# Altium PCB PCB1.PcbDoc
Units mm, origin at the board's own origin, x right, y up, seen from the top; angles counter-clockwise.
Board outline 152.4 x 101.6 mm, 2 copper layers (Top Layer, Bottom Layer); 31 components, 28 nets, 112 pads, 6 vias.
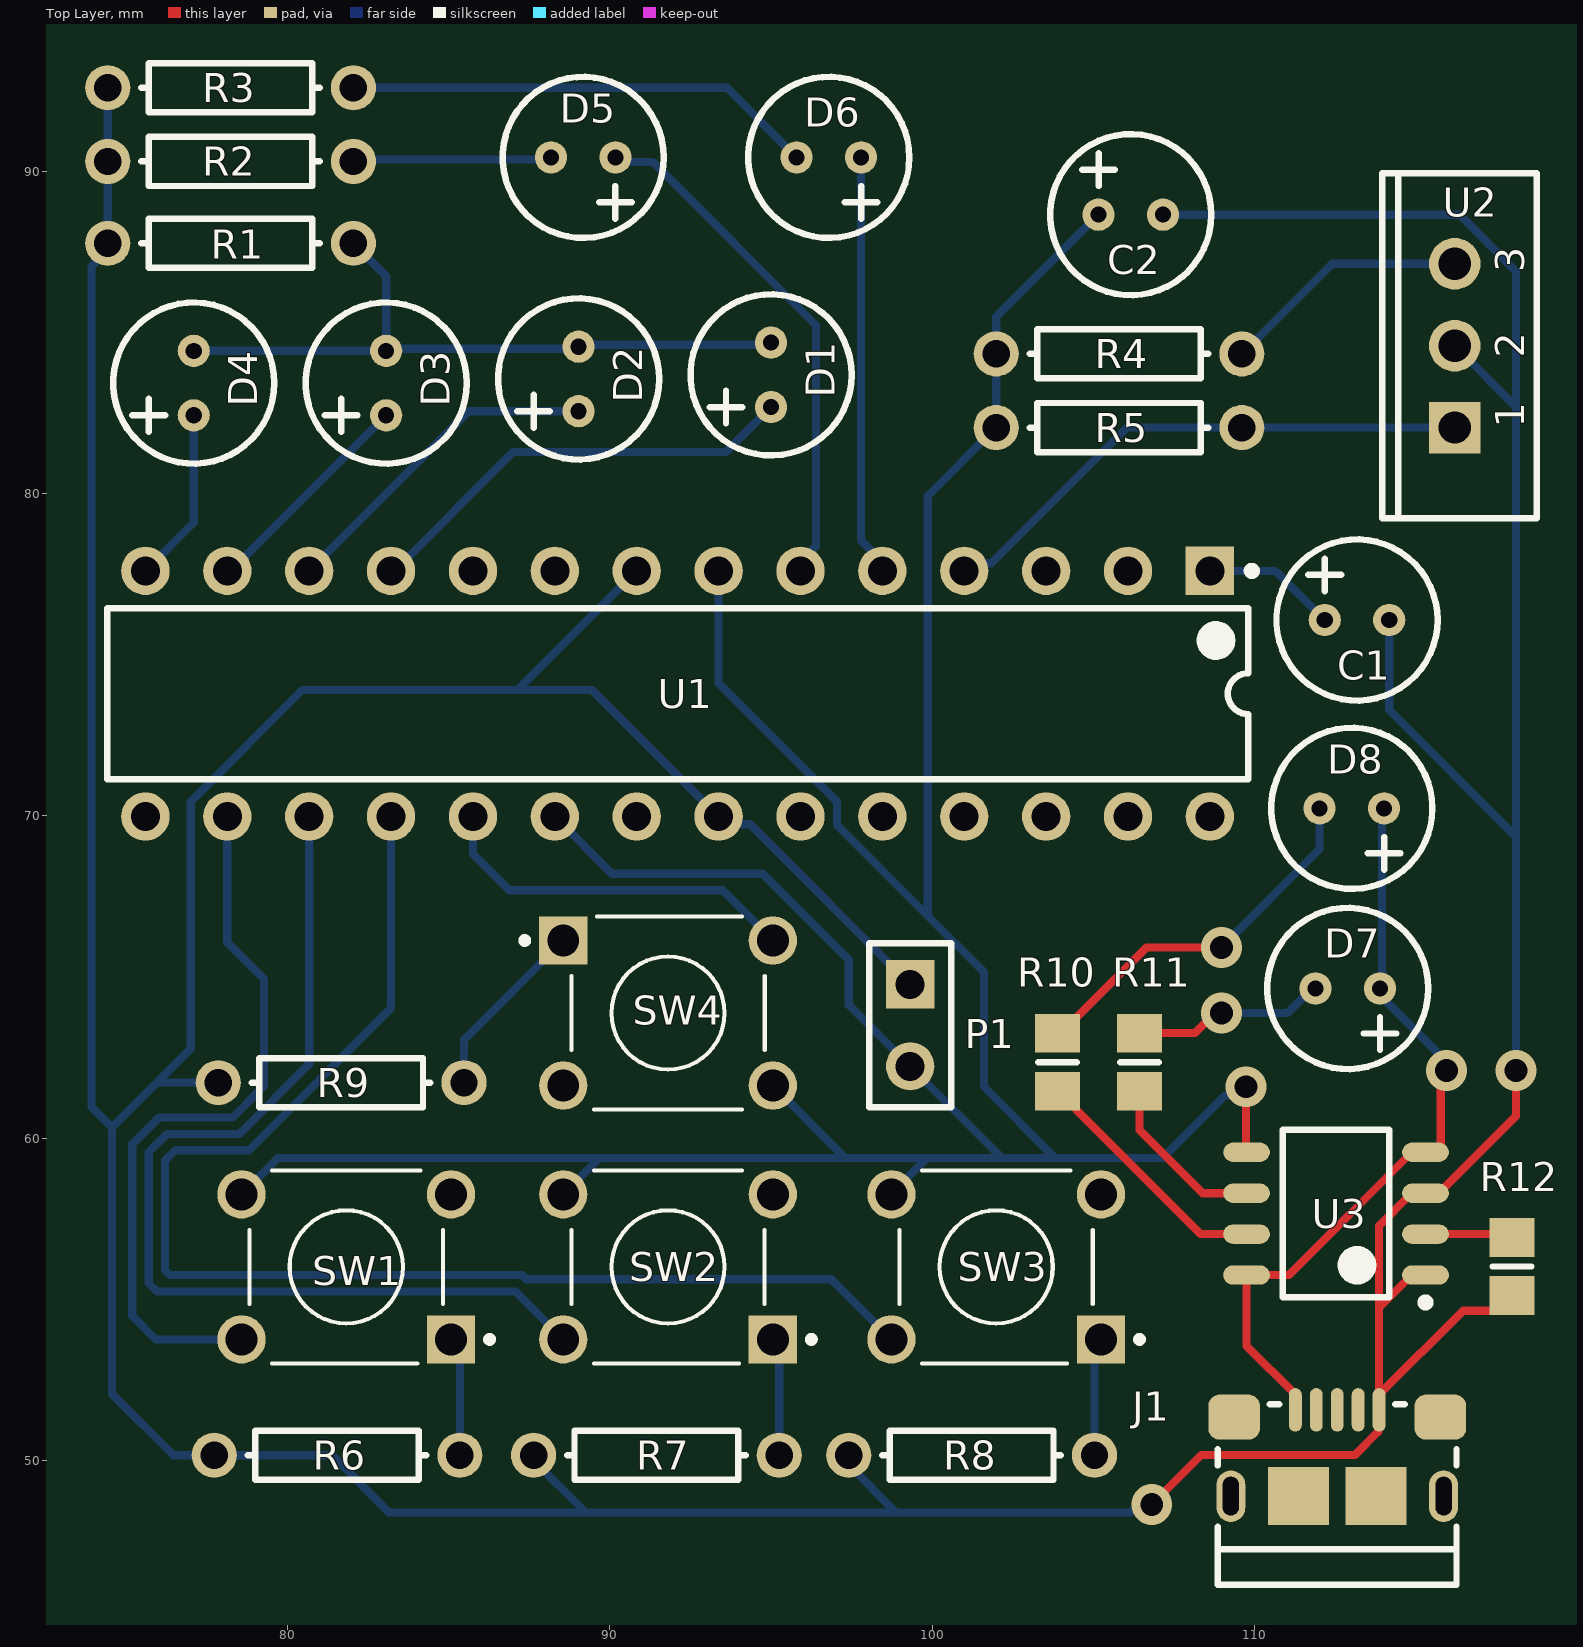
[diagram p0: Top Layer view]
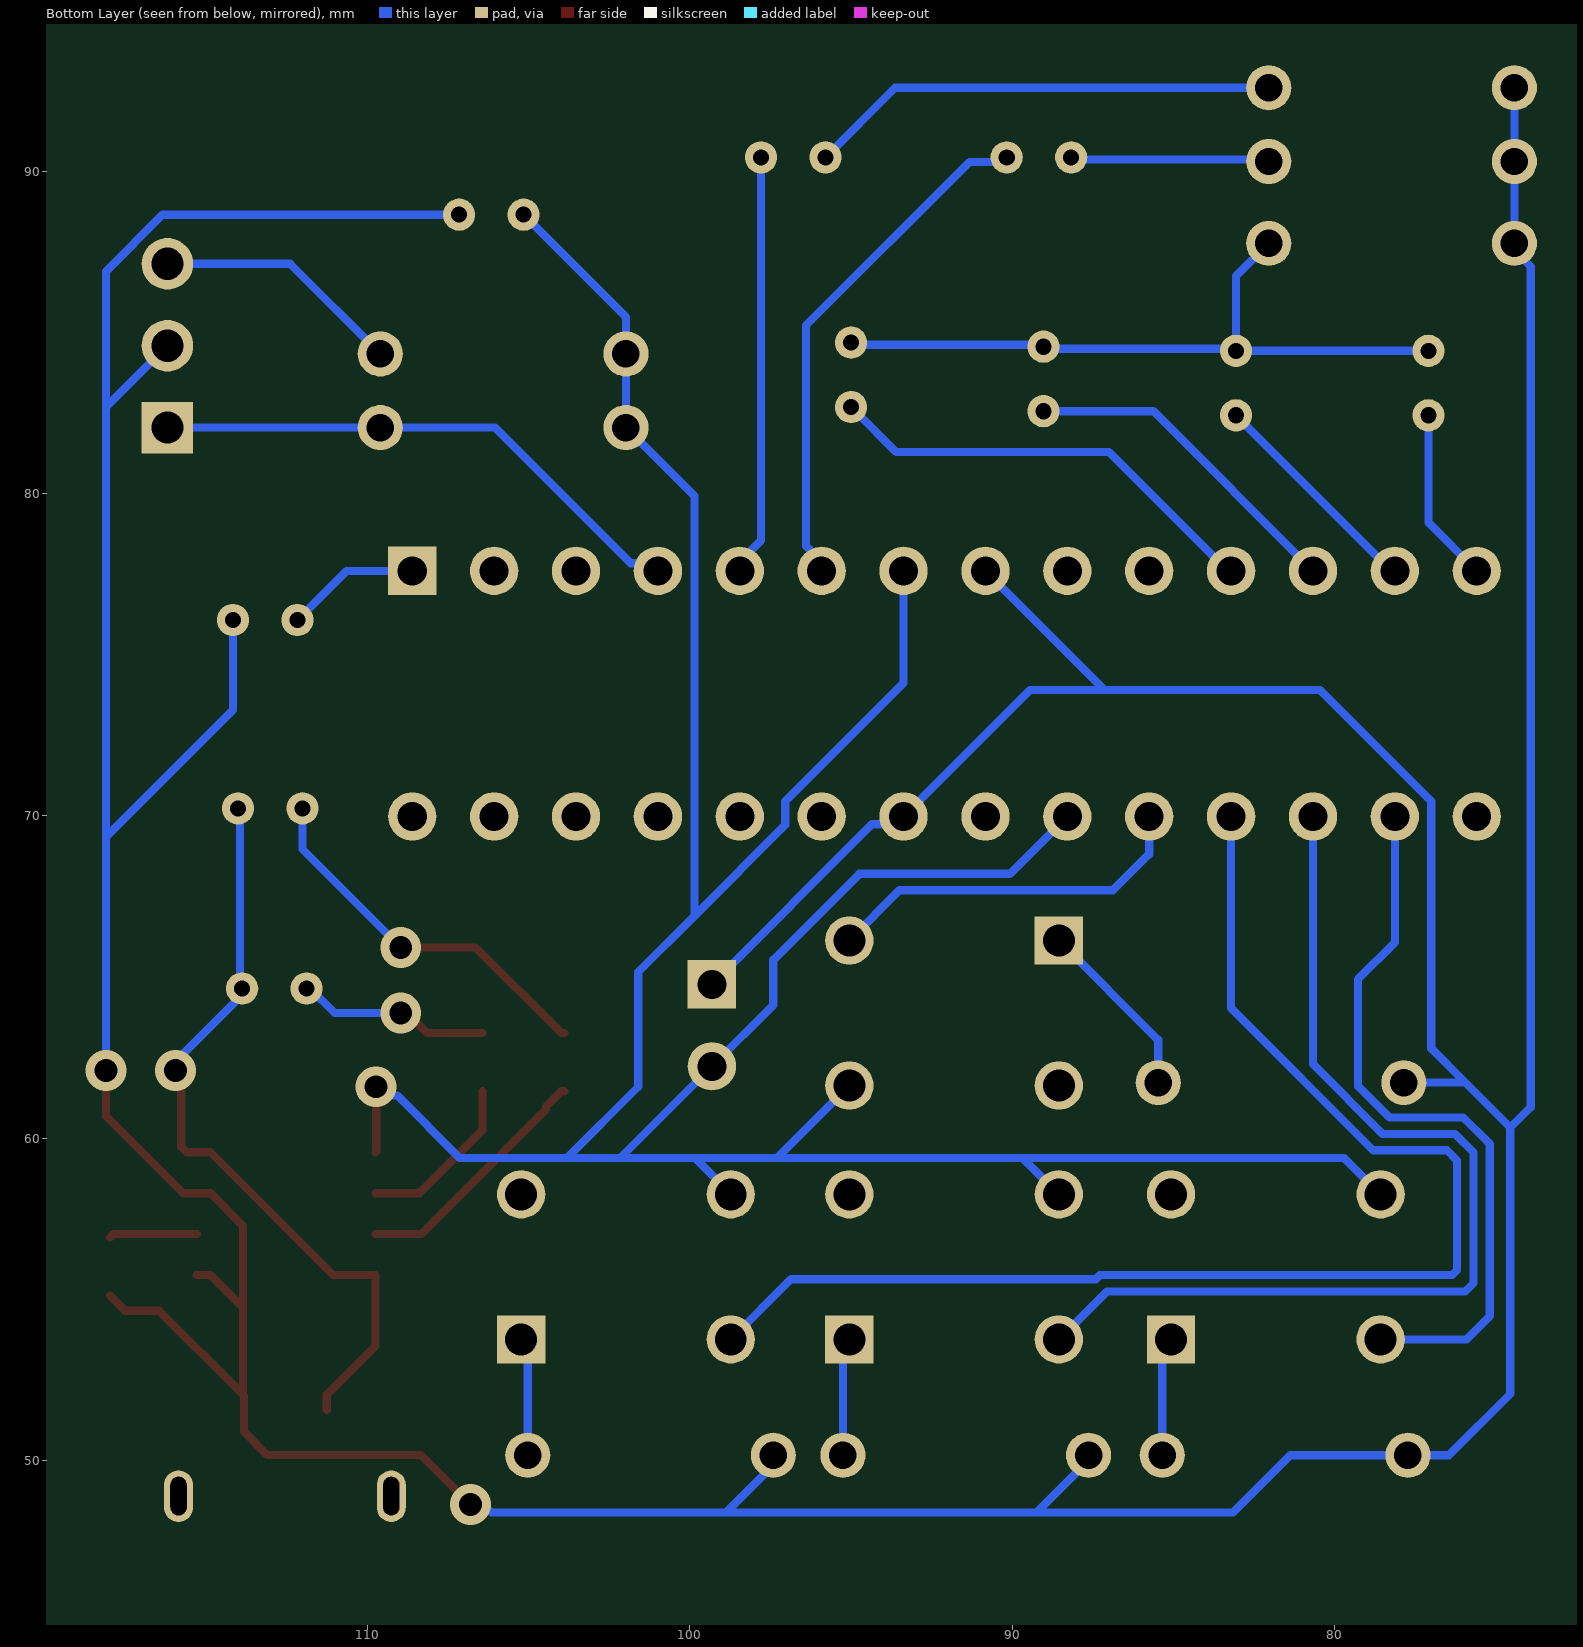
[diagram p1: Bottom Layer view, seen from below]

## Layer stack, top to bottom
Top Solder: solder mask 0.0102, Solder Resist, Dk 3.5
Top Layer: signal copper 0.0356
Dielectric 1: dielectric 0.32, FR-4, Dk 4.8
Bottom Layer: signal copper 0.0356
Bottom Solder: solder mask 0.0102, Solder Resist, Dk 3.5

## Board outline
25.4,25.4 177.8,25.4 177.8,127 25.4,127

## Design rules (kind name [scope] priority, off if disabled: settings)
BoardOutlineClearance [All] p1: gap=0.2 ignorepadtopadclearanceinfootprint=FALSE except(0.4: Arc-SplitBarrior Arc-SplitContinuation Track-SplitBarrior Track-SplitContinuation SMDPad-SplitBarrior SMDPad-SplitContinuation THPad-SplitBarrior THPad-SplitContinuation Via-SplitBarrior Via-SplitContinuation Fill-SplitBarrior Fill-SplitContinuation Poly-SplitBarrior Poly-SplitContinuation Region-SplitBarrior Region-SplitContinuation Text-SplitBarrior Text-SplitContinuation)
Clearance "Clearance Bottom Layer" [OnLayer('Bottom Layer')] p1: gap=0.203 ignorepadtopadclearanceinfootprint=TRUE except(0.254: Arc-Text Track-Text SMDPad-Text THPad-Text Via-Text Fill-Text Poly-Text Region-Text Text-Text)
Clearance "Clearance Top Layer" [OnLayer('Top Layer')] p2: gap=0.203 ignorepadtopadclearanceinfootprint=TRUE except(0.254: Arc-Text Track-Text SMDPad-Text THPad-Text Via-Text Fill-Text Poly-Text Region-Text Text-Text)
Clearance [All] p3: gap=0.2 ignorepadtopadclearanceinfootprint=FALSE except(0.089: Arc-Arc Arc-Track Arc-SMDPad Track-Track Track-SMDPad SMDPad-SMDPad; 0.127: Arc-Via Track-Via SMDPad-Via THPad-Via Via-Via; 0.254: Arc-Text Track-Text SMDPad-Text THPad-Text Via-Text Fill-Text Poly-Text Region-Text Text-Text)
HoleSize [All] p1: absolutevalues=TRUE maxlimit=6.3 minlimit=0.2 maxpercent=80.000 minpercent=20.000
MinimumAnnularRing [All] p1: minimumring=0.076
MinimumSolderMaskSliver [All] p1: minsoldermaskwidth=0.1
PolygonConnect PolygonConnect_1 [All] p1: thpad.connectstyle=Relief thpad.reliefconductorwidth=0.508 thpad.reliefentries=4 thpad.polygonreliefangle="90 Angle" thpad.airgapwidth=0.254 smdpad.connectstyle=Relief smdpad.reliefconductorwidth=0.508 smdpad.reliefentries=4 smdpad.polygonreliefangle="90 Angle" smdpad.airgapwidth=0.254 via.connectstyle=Direct via.reliefconductorwidth=0.508 via.reliefentries=4 via.polygonreliefangle="90 Angle" via.airgapwidth=0.254
RoutingCorners [All] p1: cornerstyle=Round minsetback=2.54 maxsetback=2.54
RoutingVias [All] p1: holewidth=0.5 width=1 viastyle="Through Hole" minholewidth=0.2 minwidth=0.45 maxholewidth=1 maxwidth=2
SilkToSilkClearance [All] p1: silktosilkclearance=0.1
SilkToSolderMaskClearance [IsPad] p1: minsilkscreentomaskgap=0.1 clearancetoexposedcopper=TRUE
SolderMaskExpansion [All] p1: expansion=0.102 istentingtop=FALSE
Width [All] p1: maxlimit=2.54 minlimit=0.089 preferedwidth=0.381
25 further rules are at their usual default settings.

## Classes and differential pairs
component class "Remote V2": C1 C2 D1 D2 D3 D4 D5 D6 D7 D8 J1 P1 R2 R3 R4 R5 R6 R7 R8 R9 R10 R11 R12 SW1 SW2 SW3 U1 U2 U3

## Components (designator, comment, footprint, x,y, rotation, side; value= is the part's Value field where it differs from the comment)
C1 "Cap Pol1" "5mm CAP" 112.173,76.073 r0 top value=10uF
C2 "Cap Pol1" "5mm CAP" 105.156,88.646 r0 top value=100uF
D1 "GREEN" "5mm CAP" 94.996,82.677 r90 top
D2 "GREEN" "5mm CAP" 89.027,82.55 r90 top
D3 "GREEN" "5mm CAP" 83.058,82.423 r90 top
D4 "GREEN" "5mm CAP" 77.089,82.423 r90 top
D5 "RED" "5mm CAP" 90.17,90.424 r180 top
D6 "IR" "5mm CAP" 97.79,90.424 r180 top
D7 "GREEN" "5mm CAP" 113.887,64.643 r180 top
D8 "RED" "5mm CAP" 114.014,70.231 r180 top
J1 "10118193-0001LF" "FCI USB 10118193-0001LF" 112.56,48.945 r180 top
P1 "Header 2" HDR1X2 99.314,64.77 r270 top
R1 "Res1" AXIAL-0.3 78.232,87.757 r0 top value=1K
R2 "Res1" AXIAL-0.3 78.232,90.297 r0 top value=1K
R3 "Res1" AXIAL-0.3 78.232,92.583 r0 top value=220R
R4 "Res1" AXIAL-0.3 105.791,84.328 r180 top value=100R
R5 "Res1" AXIAL-0.3 105.791,82.042 r180 top value=47k
R6 "Res1" AXIAL-0.3 81.534,50.165 r0 top value=22k
R7 "Res1" AXIAL-0.3 91.44,50.165 r0 top value=22k
R8 "Res1" AXIAL-0.3 101.219,50.165 r0 top value=22k
R9 "Res1" AXIAL-0.3 81.661,61.722 r0 top value=22k
R10 "Res1" 6-0805_N 103.886,62.357 r90 top value=1K
R11 "Res1" 6-0805_N 106.426,62.357 r90 top value=1k
R12 "Res1" 6-0805_N 117.983,56.018 r90 top value=2k
SW1 "430476085716" SW_1825910-6-4 81.821,56.007 r180 top
SW2 "430476085716" SW_1825910-6-4 91.802,56.007 r180 top
SW3 "430476085716" SW_1825910-6-4 101.981,56.007 r180 top
SW4 "430476085716" SW_1825910-6-4 91.802,63.881 r0 top
U1 "ATmega328P-PU" 28P3 92.1,73.787 r270 top
U2 "CHO 1838" TO-220-AB 116.205,84.582 r90 top
U3 "TP4056" "Universal SOP 8" 112.522,57.658 r180 top

## Footprints (in the part's own frame and the unit in brackets; to place one, negate y for a bottom-side part, rotate by r counter-clockwise, add the part's x,y. Pads: shape width x height; smd on the part's side, far side on the other; paste and mask are expansions set on the pad)
"5mm CAP" [mm]
  round 1 hole 0.5: 1(0,0) 2(2,0)
  silkscreen extent -1.5,-2.5 3.5,2.5
6-0805_N [mm] "Chip Resistor, Body 2.0x1.2mm, IPC Medium Density"
  rect 1.2x1.4 smd: 1(-0.9,0) 2(0.9,0)
  silkscreen extent 0,-0.6 0,0.6, body extent -1.07,-0.7 1.07,0.7, height 0.7
28P3 [mm] "28-Pin Plastic Dual In-Line Package (PDIP)"
  rect 1.5x1.5 hole 0.9: 1(-3.81,16.51)
  round 1.5 hole 0.9: 2(-3.81,13.97) 3(-3.81,11.43) 4(-3.81,8.89) 5(-3.81,6.35) 6(-3.81,3.81) 7(-3.81,1.27) 8(-3.81,-1.27) 9(-3.81,-3.81) 10(-3.81,-6.35) 11(-3.81,-8.89) 12(-3.81,-11.43) 13(-3.81,-13.97) 14(-3.81,-16.51) 15(3.81,-16.51) 16(3.81,-13.97) 17(3.81,-11.43) 18(3.81,-8.89) 19(3.81,-6.35) 20(3.81,-3.81) 21(3.81,-1.27) 22(3.81,1.27) 23(3.81,3.81) 24(3.81,6.35) 25(3.81,8.89) 26(3.81,11.43) 27(3.81,13.97) 28(3.81,16.51)
  silkscreen extent -3.93,-17.7 2.65,17.94, body extent -3.6,-17.65 3.6,17.65, height 4.58
AXIAL-0.3 [mm] "Axial Device, Thru-Hole; 2 Leads; 0.3 in Pin Spacing"
  round 1.4 hole 0.85: 1(-3.81,0) 2(3.81,0)
  silkscreen extent -2.77,-0.76 2.77,0.76
"FCI USB 10118193-0001LF" [mm] "USB 2.0 Type B Micro"
  oval 0.4x1.35 smd: 1(1.3,-2.625) 2(0.65,-2.625) 3(0,-2.625) 4(-0.65,-2.625) 5(-1.3,-2.625)
  oval 0.9x1.6 hole 0.5 slot 1.2 at 90 deg: S(-3.3,0.05) S(3.3,0.05)
  rrect50% 1.6x1.4 smd: S(-3.2,-2.4) S(3.2,-2.4)
  rect 1.9x1.8 smd: S(-1.2,0.05) S(1.2,0.05)
  silkscreen extent -3.7,-2.8 3.7,2.8, body extent -3.93,-2.9 3.93,2.76, height 2.78
HDR1X2 [mm] "Connector; Header; 2 Position"
  rect 1.5x1.5 hole 0.9: 1(0,0)
  round 1.5 hole 0.9: 2(2.54,0)
  silkscreen extent -1.27,-1.27 3.81,1.27
SW_1825910-6-4 [mm]
  rect 1.498x1.498 hole 0.99: 1(-3.25,2.25)
  round 1.498 hole 0.99: 2(3.25,2.25) 3(-3.25,-2.25) 4(3.25,-2.25)
  silkscreen extent -4.54,-3 3,3
TO-220-AB [mm] "TO, Thru-Hole, Vertical, Heatsink Mounted; 3 In-Line Leads; Pitch 2.54 mm"
  rect 1.6x1.6 hole 1: 1(-2.54,0)
  round 1.6 hole 1: 2(0,0) 3(2.54,0)
  silkscreen extent -5.35,-2.55 5.35,2.25
"Universal SOP 8" [mm]
  oval 1.45x0.6 smd: 1(-2.775,1.905) 2(-2.775,0.635) 3(-2.775,-0.635) 4(-2.775,-1.905) 5(2.775,-1.905) 6(2.775,-0.635) 7(2.775,0.635) 8(2.775,1.905)
  silkscreen extent -2.9,-2.6 1.65,2.88, body extent -3,-2.6 3,2.6, height 1.75

## Part data
C1 C2: "Polarized Capacitor (Radial)", LatestRevisionDate=17-Jul-2002, LatestRevisionNote="Re-released for DXP Platform.", PackageDescription="Polarized Capacitor (Radial); 2 Leads", PackageReference=RB7.6-15, Published=8-Jun-2000, Publisher="Altium Limited"
D1 D2 D3 D4 D5 D6 D7 D8: library part LED0, "Typical INFRARED GaAs LED", LatestRevisionDate=08-Jul-2005, LatestRevisionNote="Mech Layer 1 removed.", PackageDescription="LED; 2 Leads", PackageReference=LED-0, Published=8-Jun-2000, Publisher="Altium Limited"
J1: "CONN RCPT USB2.0 MICRO B SMD R/A", Current Rating (Amps)="1.8A per Contact", Manufacturer="Amphenol ICC (FCI)", Operating Temperature="-30°C ~ 80°C", Supplier Part Number 1=609-4616-2-ND, Voltage - Rated=100VAC, ComponentLink1Description=Datasheet, ComponentLink1URL=https://cdn.amphenol-icc.com/media/wysiwyg/files/documentation/datasheet/inputoutput/io_usb_micro.pdf, ComponentLink2Description="DigiKey Link", ComponentLink2URL=//digikey.com/product-detail/en/amphenol-icc-fci/10118193-0001LF/609-4616-2-ND/2785388, Connector Type="USB - micro B", Features="Solder Retention", Gender=Receptacle, LastUpdated="12/9/2019 8:51:28 PM", Lifecycle Status=0, Mating Cycles=10000, Minimum Order=1, Mounting Feature=Horizontal, Mounting Type="Surface Mount, Right Angle; Through Hole", Number of Contacts=5, Number of Ports=1, Packaging=TapeAndReel, Part Number=10118193-0001LF, Part Status=Active, Price=0.21, Series=-, Shielding=Shielded, Specifications="USB 2.0", Supplier 1=DigiKey, Termination=Solder
P1: "Header, 2-Pin", LatestRevisionDate=17-Jul-2002, LatestRevisionNote="Re-released for DXP Platform.", Publisher="Altium Limited"
R1 R2 R3 R4 R5 R6 R7 R8 R9 R10 R11 R12: "Resistor", LatestRevisionDate=17-Jul-2002, LatestRevisionNote="Re-released for DXP Platform.", PackageDescription="Axial Device, Thru-Hole; 2 Leads; 0.3 in Pin Spacing", PackageReference=AXIAL-0.3, Published=8-Jun-2000, Publisher="Altium Limited"
SW1 SW2 SW3 SW4: "WS-TATV THT Tact Switch 12X12 mm", ComponentLink1Description="Manufacturer URL", ComponentLink1URL=http://www.we-online.com, ComponentLink2Description=Datasheet, ComponentLink2URL=http://katalog.we-online.de/em/datasheet/430476085716.pdf, NoPins=04, PackageReference=430476085716, PartNumber=430476085716
U1: "8-bit AVR Microcontroller, 32KB Flash, 1KB EEPROM, 2KB SRAM, 28-pin PDIP, Industrial Grade (-40°C to 85°C)", ComponentLink1Description="Manufacturer URL", ComponentLink1URL=http://www.atmel.com/, ComponentLink2Description="ATmega48A/48PA/88A/88PA/168A/168PA/328/328P Datasheet", ComponentLink2URL=http://www.atmel.com/dyn/resources/prod_documents/8271.pdf, ComponentLink3Description="ATmega48A/48PA/88A/88PA/168A/168PA/328/328P Summary", ComponentLink3URL=http://www.atmel.com/dyn/resources/prod_documents/8271S.pdf, DatasheetVersion="revD, May-2011", PackageDescription="28-lead (0.300\"/7.62mm Wide) Plastic Dual Inline Package (PDIP)", PackageReference=28P3, PackageVersion="revB, Sep-2001"
U2: "IR Receiver"

## Via types
v1: diameter 1.27, hole 0.711, Top Layer to Bottom Layer, 6 vias

## Nets (pads, with @x,y where several pads share a name; then routed paths per layer and width w, separated by ;. In a path a pad name is that pad's centre, name@x,y a point inside that pad or via, vN(x,y) a via of type N, cw(c..) or ccw(c..) an arc to the next point about the centre after c; other vN are vias at no path point)
GND: C1.2 C2.2 J1.5 P1.1 R1.1 R2.1 R3.1 R6.1 R7.1 R8.1 R9.1 R12.1 U1.8 U1.22 U2.2 U3.1 U3.3 | length 201.9
  Top Layer w0.254: v1(106.807,48.641) 108.342,50.176 113.113,50.176 113.832,50.895 113.832,52.017 J1.5@113.86,52.045 ; U3.1 114.872,55.753 113.86,54.741 ; R12.1 117.51,54.645 116.46,54.645 J1.5@113.86,52.045 ; v1(118.11,62.103) 118.11,60.681 115.722,58.293 U3.3 114.872,58.293 113.86,57.281 113.86,54.741 ; J1.5@113.86,52.045 113.86,54.741
  Bottom Layer w0.254: R3.1 R2.1 R1.1 74.422,87.543 73.914,87.035 73.914,60.96 74.549,60.325 ; R9.1 75.946,61.722 ; R7.1 87.63,50.007 89.25,48.387 ; U1.8 87.135,73.902 ; R8.1 97.409,49.855 98.877,48.387 ; P1.1 94.345,69.739 93.608,69.739 U1.22 89.445,73.902 87.135,73.902 ; v1(106.807,48.641) 106.613,48.447 106.21,48.447 106.15,48.387 98.877,48.387 ; C2.2 116.351,88.646 118.11,86.887 118.11,82.677 ; C1.2@114.316,76.216 C1.2 114.173,73.279 118.11,69.342 ; U2.2 118.11,82.677 ; v1(118.11,62.103) 118.11,69.342 ; 74.549,60.325 75.946,61.722 ; 74.549,60.325 74.549,52.07 76.454,50.165 R6.1 81.372,50.165 83.15,48.387 89.25,48.387 ; 75.946,61.722 76.999,62.775 76.999,70.445 80.455,73.902 87.135,73.902 ; 89.25,48.387 98.877,48.387 ; 118.11,69.342 118.11,82.677
NetC1_1: C1.1 U1.1 | length 4.2
  Bottom Layer w0.254: U1.1 110.649,77.597 C1.1
NetD1_1: D1.1 U1.11 | length 14
  Bottom Layer w0.254: U1.11 83.312,77.597 86.995,81.28 93.599,81.28 94.869,82.55 94.996,82.55 D1.1
NetD1_2: D1.2 D2.2 D3.2 D4.2 R1.2 | length 21.7
  Bottom Layer w0.254: D4.2 D3.2 ; R1.2@82.042,87.376 R1.2@82.042,87.447 ; R1.2 83.058,86.741 D3.2 ; D2.2 88.963,84.487 83.121,84.487 D3.2 ; D2.2@89.09,84.614 94.932,84.614 D1.2
NetD2_1: D2.1 U1.12 | length 10.4
  Bottom Layer w0.254: U1.12 85.623,82.55 D2.1
NetD3_1: D3.1 U1.13 | length 6.9
  Bottom Layer w0.254: U1.13 78.232,77.597 81.021,80.386 D3.1
NetD4_1: D4.1 U1.14 | length 5.4
  Bottom Layer w0.254: U1.14 77.089,79.096 D4.1
NetD5_1: D5.1 U1.6 | length 16.2
  Bottom Layer w0.254: D5.1 90.313,90.281 91.329,90.281 96.393,85.217 96.393,78.369 95.91,77.886 U1.6
NetD5_2: D5.2 R2.2 | length 6.2
  Bottom Layer w0.254: R2.2 82.105,90.361 88.106,90.361 D5.2
NetD6_1: D6.1 U1.5 | length 13.1
  Bottom Layer w0.254: D6.1 97.79,78.537 98.45,77.877 U1.5
NetD6_2: D6.2 R3.2 | length 14.6
  Bottom Layer w0.254: R3.2 93.631,92.583 D6.2
NetD7_1: D7.1 D8.1 J1.1 U3.4 U3.8 | length 24
  Top Layer w0.254: J1.1 111.26,52.045 109.747,53.558 U3.8 111.062,55.753 114.872,59.563 U3.4 115.613,59.563 115.773,59.723 115.773,61.925 v1(115.951,62.103)
  Bottom Layer w0.254: D8.1 113.951,70.168 113.951,64.706 D7.1 113.887,64.441 115.951,62.377 v1(115.951,62.103)
NetD7_2: D7.2 R11.2 | length 6
  Top Layer w0.254: R11.2 108.153,63.257 108.777,63.881 v1(108.966,63.881)
  Bottom Layer w0.254: v1(108.966,63.881) 111.014,63.881 111.776,64.643 D7.2
NetD8_2: D8.2 R10.2 | length 11.8
  Top Layer w0.254: R10.2 103.986,63.257 106.642,65.913 v1(108.966,65.913)
  Bottom Layer w0.254: v1(108.966,65.913) 112.014,68.961 D8.2
NetR4_1: R4.1 U2.3 | length 7.9
  Bottom Layer w0.254: R4.1 112.395,87.122 U2.3 ; R4.1@109.728,84.328 R4.1@109.855,84.201
NetR5_1: R5.1 U1.4 U2.1 | length 17.1
  Bottom Layer w0.254: U1.4 101.228,77.835 101.838,77.835 106.045,82.042 R5.1 U2.1
NetR6_2: R6.2 SW1.1 | length 3.7
  Bottom Layer w0.254: SW1.1 85.344,53.484 R6.2
NetR7_2: R7.2 SW2.1 | length 3.7
  Bottom Layer w0.254: SW2.1 95.25,53.559 R7.2
NetR8_2: R8.2 SW3.1 | length 3.7
  Bottom Layer w0.254: R8.2 105.029,53.555 SW3.1
NetR9_2: R9.2 SW4.1 | length 5.7
  Bottom Layer w0.254: R9.2 85.471,63.05 SW4.1
NetR10_1: R10.1 U3.7 | length 7.8
  Top Layer w0.254: R10.1 103.986,61.457 104.459,60.984 104.459,60.884 108.32,57.023 U3.7
NetR11_1: R11.1 U3.6 | length 5.3
  Top Layer w0.254: R11.1 106.426,60.251 108.384,58.293 U3.6
NetR12_2: R12.2 U3.2 | length 2.7
  Top Layer w0.254: U3.2 117.878,57.023 R12.2
NetSW1_2: SW1.2 U1.16 | length 22.7
  Bottom Layer w0.254: U1.16 78.13,66.071 79.27,64.931 79.27,61.612 78.299,60.641 76.008,60.641 75.184,59.817 75.184,54.483 75.91,53.757 SW1.2
NetSW2_2: SW2.2 U1.17 | length 31.4
  Bottom Layer w0.254: U1.17 80.67,62.294 78.509,60.133 76.262,60.133 75.692,59.563 75.692,55.499 75.946,55.245 87.064,55.245 SW2.2
NetSW3_2: SW3.2 U1.18 | length 41.7
  Bottom Layer w0.254: U1.18 83.21,64.033 78.802,59.625 76.516,59.625 76.2,59.309 76.2,55.902 76.349,55.753 87.274,55.753 87.401,55.626 96.862,55.626 SW3.2
NetSW4_2: SW4.2 U1.19 | length 11.6
  Bottom Layer w0.254: U1.19 85.75,68.809 86.868,67.691 93.492,67.691 SW4.2
VCC: C2.1 P1.2 R4.2 R5.2 SW1.4 SW2.4 SW3.4 SW4.4 U1.7 U1.20 U3.5 | length 106.5
  Top Layer w0.254: v1(109.728,61.595) 109.728,59.582 U3.5
  Bottom Layer w0.254: SW1.4 79.701,59.387 89.682,59.387 ; U1.20 90.068,68.199 94.742,68.199 97.409,65.532 97.409,64.135 P1.2 102.157,59.387 ; SW2.4 89.682,59.387 ; U1.7 93.37,74.116 97.041,70.445 97.041,69.71 99.859,66.892 ; SW4.4 97.296,59.387 ; SW3.4 98.731,58.278 99.84,59.387 ; C2.1 101.981,85.471 R4.2 R5.2 99.859,79.92 99.859,66.892 ; v1(109.728,61.595) 109.453,61.595 109.179,61.321 109.073,61.321 107.139,59.387 103.808,59.387 ; 89.682,59.387 97.296,59.387 ; 97.296,59.387 99.84,59.387 ; 99.84,59.387 102.157,59.387 ; 99.859,66.892 101.6,65.151 101.6,61.595 103.808,59.387 ; 102.157,59.387 103.808,59.387
pads on no net: J1.2 J1.3 J1.4 J1.S SW1.3 SW2.3 SW3.3 SW4.3 U1.2 U1.3 U1.9 U1.10 U1.15 U1.21 U1.23 U1.24 U1.25 U1.26 U1.27 U1.28

## Silkscreen, mask and mechanical layers (free items; w line width, h text height)
Top Overlay:
  text "R1" at 77.62,87.272 h0.9
  text "SW4" at 90.701,63.523 h0.9
Mechanical 13:
  lines w0.2: 72.644,45.085 72.644,94.234 119.634,94.234 119.634,45.085 72.644,45.085

## Text inside footprints (layer, text, board x,y; h text height)
U2: Top Overlay "1" at 118.364,82.042 h0.9 r90; Top Overlay "2" at 118.364,84.201 h0.9 r90; Top Overlay "3" at 118.364,86.868 h0.9 r90